# Altium PCB DSD_Badge.PcbDoc
Units mil, origin at the board's own origin, x right, y up, seen from the top; angles counter-clockwise.
Board outline 3149.61 x 3149.61 mil, 2 copper layers (Top Layer, Bottom Layer); 38 components, 38 nets, 192 pads, 0 vias.
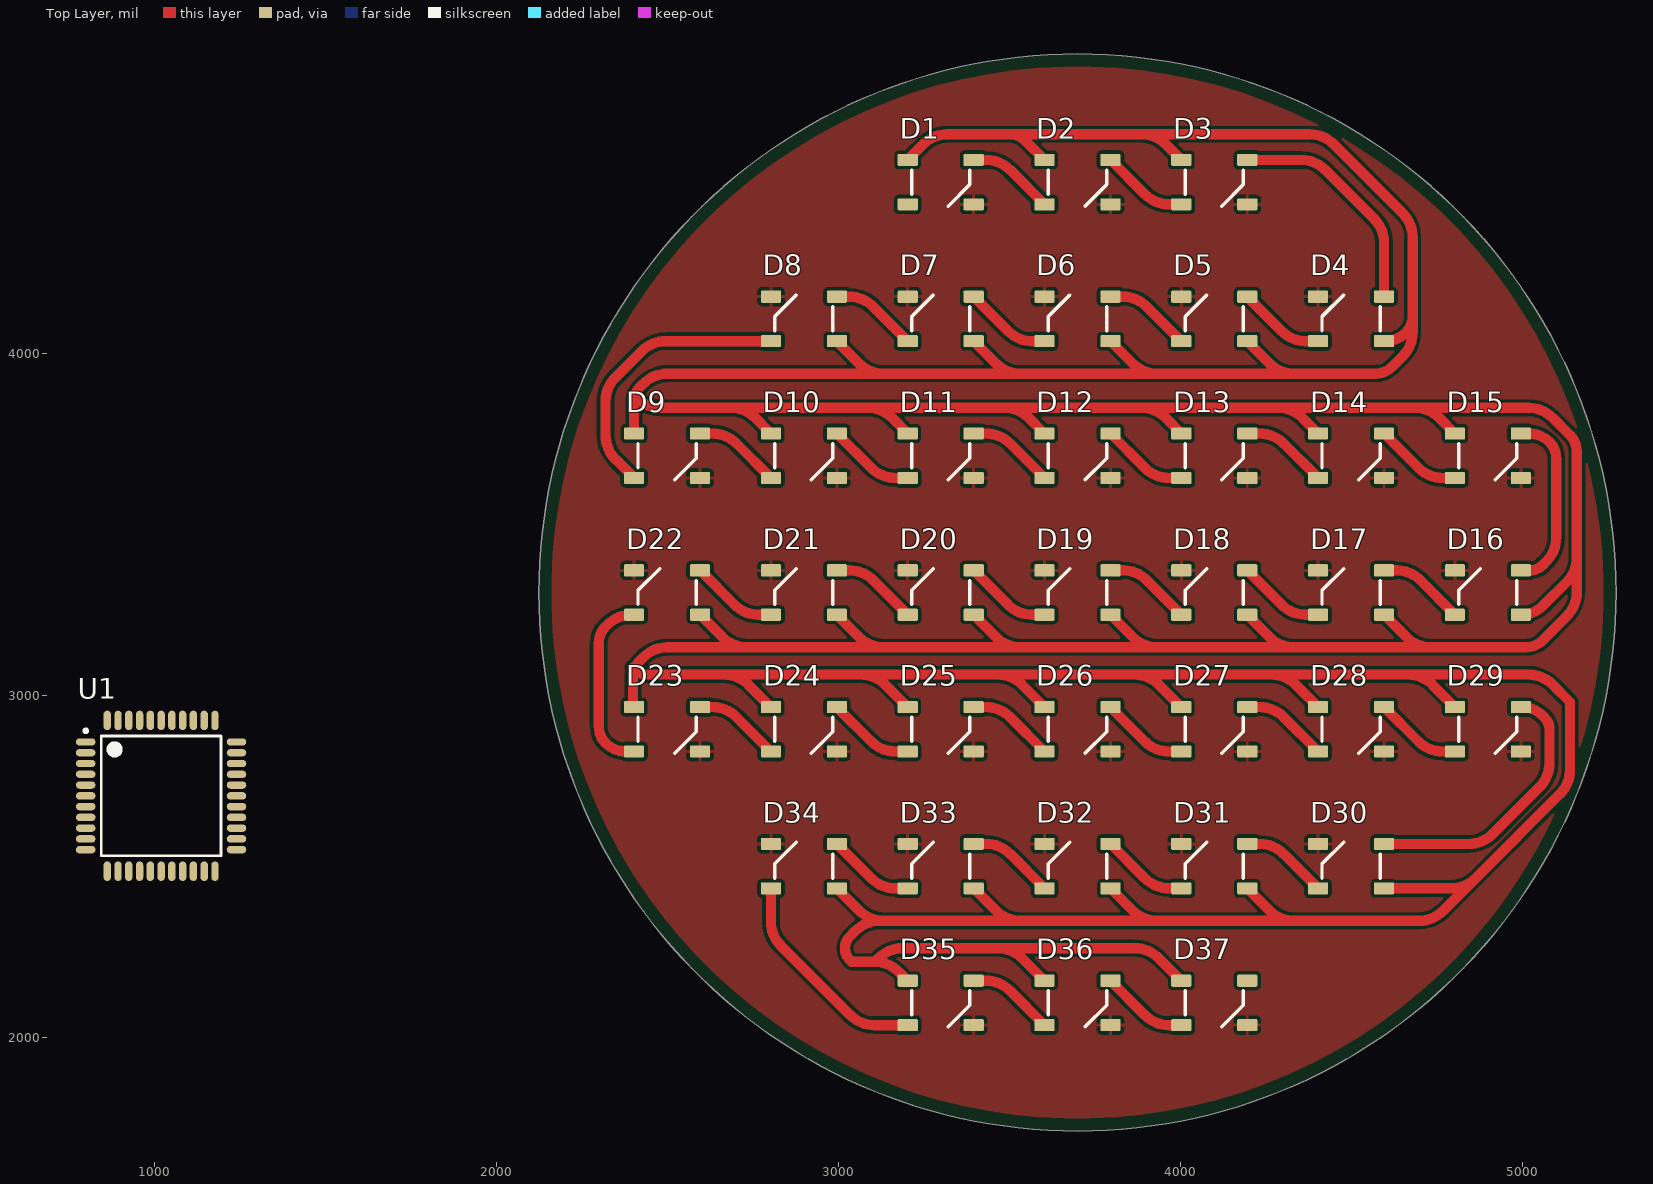
[diagram p0: Top Layer view]
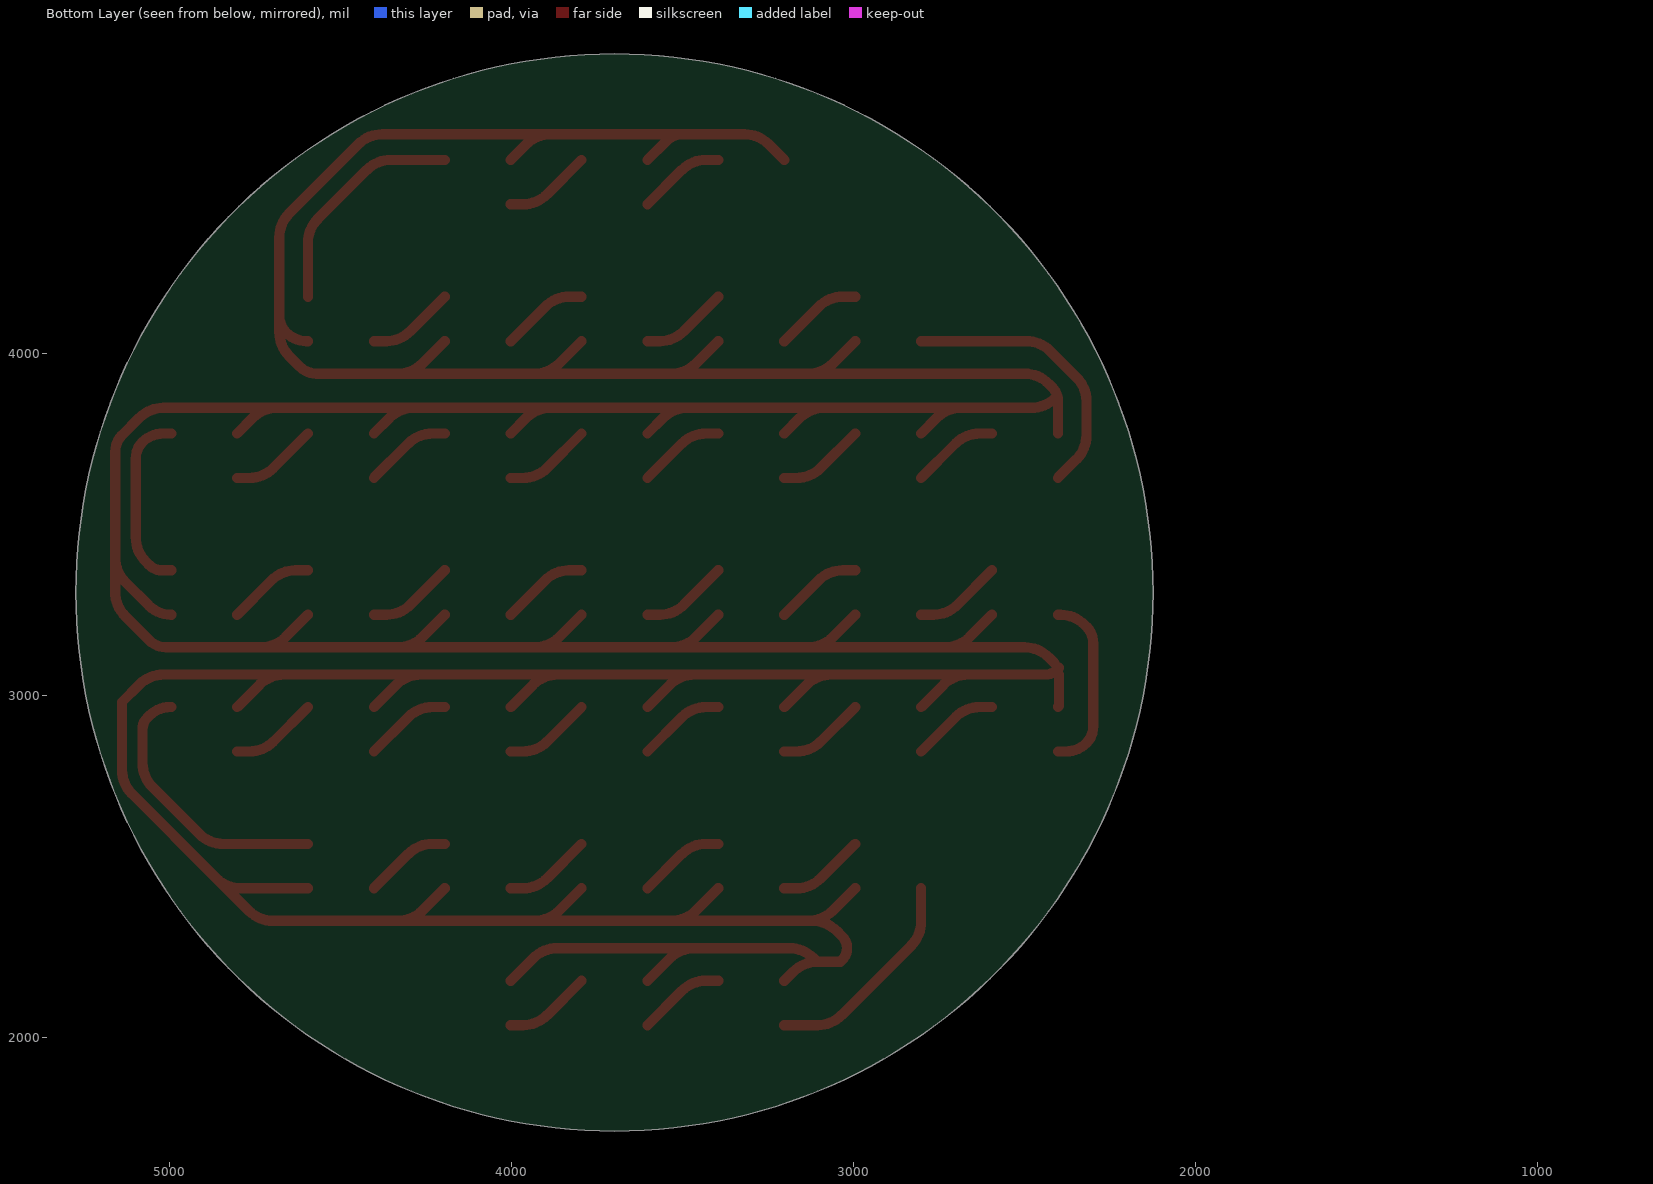
[diagram p1: Bottom Layer view, seen from below]
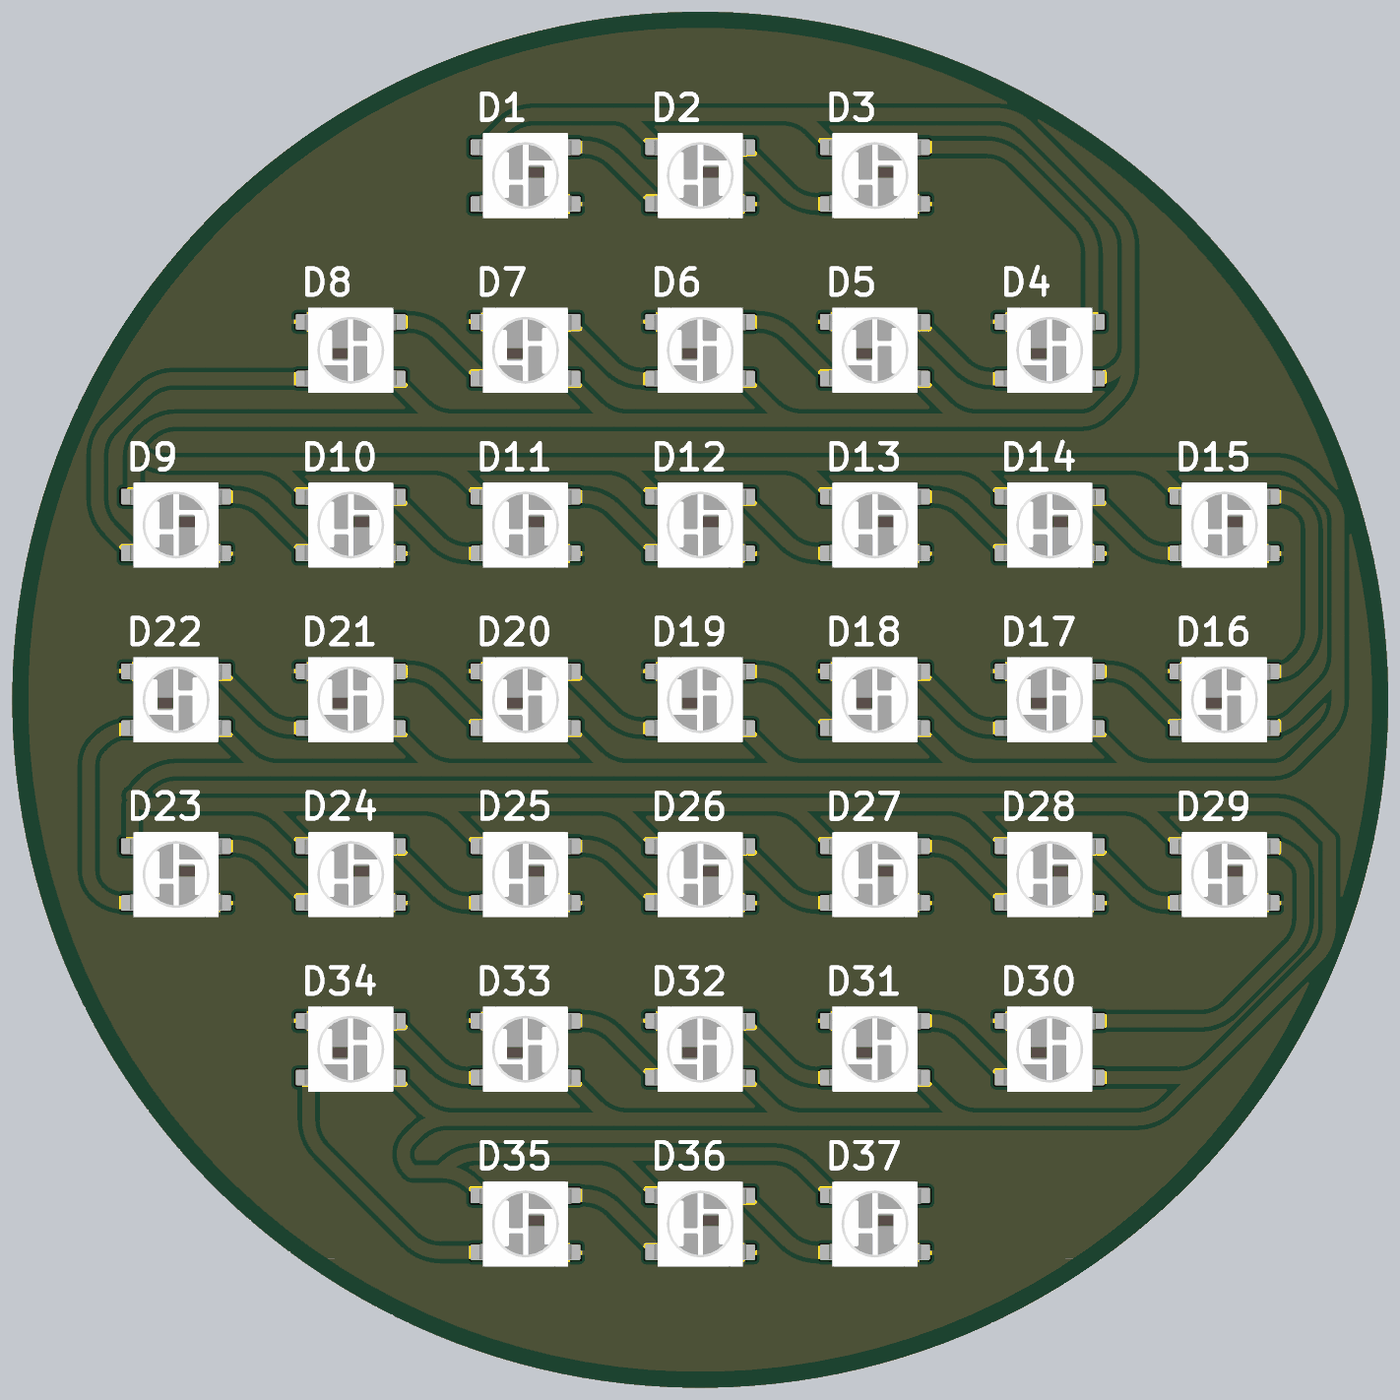
[diagram p2: 3D render of the assembled board from above, using the file's embedded part models]

## Layer stack, top to bottom
Top Solder: solder mask 0.4, Solder Resist, Dk 3.5
Top Layer: signal copper 1.4
Dielectric 1: dielectric 12.6, FR-4, Dk 4.8
Bottom Layer: signal copper 1.4
Bottom Solder: solder mask 0.4, Solder Resist, Dk 3.5

## Board outline
2125.2,3300 ccw(c3700,3300) 3700,1725.2 ccw(c3700,3300) 5274.8,3300 ccw(c3700,3300) 3700,4874.8 ccw(c3700,3300)

## Design rules (kind name [scope] priority, off if disabled: settings)
Clearance [All] p1: gap=10 ignorepadtopadclearanceinfootprint=FALSE except(0: Arc-Hole Track-Hole SMDPad-Hole THPad-Hole Via-Hole Fill-Hole Poly-Hole Region-Hole Text-Hole)
PolygonConnect [All] p1: connectstyle=Relief reliefconductorwidth=10 reliefentries=4 polygonreliefangle="90 Angle" airgapwidth=10
RoutingVias [All] p1: holewidth=28 width=50 viastyle="Through Hole" minholewidth=28 minwidth=50 maxholewidth=28 maxwidth=50
SolderMaskExpansion [All] p1: expansion=4
Width [All] p1: maxlimit=30 minlimit=10 preferedwidth=15
30 further rules are at their usual default settings.

## Components (designator, comment, footprint, x,y, rotation, side; value= is the part's Value field where it differs from the comment)
D1 "WS2812b" WS2812B 3300,4500 r0 top
D2 "WS2812b" WS2812B 3700,4500 r0 top
D3 "WS2812b" WS2812B 4100,4500 r0 top
D4 "WS2812b" WS2812B 4500,4100 r180 top
D5 "WS2812b" WS2812B 4100,4100 r180 top
D6 "WS2812b" WS2812B 3700,4100 r180 top
D7 "WS2812b" WS2812B 3300,4100 r180 top
D8 "WS2812b" WS2812B 2900,4100 r180 top
D9 "WS2812b" WS2812B 2500,3700 r0 top
D10 "WS2812b" WS2812B 2900,3700 r0 top
D11 "WS2812b" WS2812B 3300,3700 r0 top
D12 "WS2812b" WS2812B 3700,3700 r0 top
D13 "WS2812b" WS2812B 4100,3700 r0 top
D14 "WS2812b" WS2812B 4500,3700 r0 top
D15 "WS2812b" WS2812B 4900,3700 r0 top
D16 "WS2812b" WS2812B 4900,3300 r180 top
D17 "WS2812b" WS2812B 4500,3300 r180 top
D18 "WS2812b" WS2812B 4100,3300 r180 top
D19 "WS2812b" WS2812B 3700,3300 r180 top
D20 "WS2812b" WS2812B 3300,3300 r180 top
D21 "WS2812b" WS2812B 2900,3300 r180 top
D22 "WS2812b" WS2812B 2500,3300 r180 top
D23 "WS2812b" WS2812B 2500,2900 r0 top
D24 "WS2812b" WS2812B 2900,2900 r0 top
D25 "WS2812b" WS2812B 3300,2900 r0 top
D26 "WS2812b" WS2812B 3700,2900 r0 top
D27 "WS2812b" WS2812B 4100,2900 r0 top
D28 "WS2812b" WS2812B 4500,2900 r0 top
D29 "WS2812b" WS2812B 4900,2900 r0 top
D30 "WS2812b" WS2812B 4500,2500 r180 top
D31 "WS2812b" WS2812B 4100,2500 r180 top
D32 "WS2812b" WS2812B 3700,2500 r180 top
D33 "WS2812b" WS2812B 3300,2500 r180 top
D34 "WS2812b" WS2812B 2900,2500 r180 top
D35 "WS2812b" WS2812B 3300,2100 r0 top
D36 "WS2812b" WS2812B 3700,2100 r0 top
D37 "WS2812b" WS2812B 4100,2100 r0 top
U1 "ATXMEGA32A4U-AU" 44A_L 1020.47,2705.51 r0 top

## Footprints (in the part's own frame and the unit in brackets; to place one, negate y for a bottom-side part, rotate by r counter-clockwise, add the part's x,y. Pads: shape width x height; smd on the part's side, far side on the other; paste and mask are expansions set on the pad)
44A_L [mm] "Thin QFP, 44-Leads, Body 10x10mm, Pitch 0.8mm, IPC High Density"
  oval 1.45x0.55 smd: 1(-5.6,4) 2(-5.6,3.2) 3(-5.6,2.4) 4(-5.6,1.6) 5(-5.6,0.8) 6(-5.6,0) 7(-5.6,-0.8) 8(-5.6,-1.6) 9(-5.6,-2.4) 10(-5.6,-3.2) 11(-5.6,-4) 23(5.6,-4) 24(5.6,-3.2) 25(5.6,-2.4) 26(5.6,-1.6) 27(5.6,-0.8) 28(5.6,0) 29(5.6,0.8) 30(5.6,1.6) 31(5.6,2.4) 32(5.6,3.2) 33(5.6,4)
  oval 0.55x1.45 smd: 12(-4,-5.6) 13(-3.2,-5.6) 14(-2.4,-5.6) 15(-1.6,-5.6) 16(-0.8,-5.6) 17(0,-5.6) 18(0.8,-5.6) 19(1.6,-5.6) 20(2.4,-5.6) 21(3.2,-5.6) 22(4,-5.6) 34(4,5.6) 35(3.2,5.6) 36(2.4,5.6) 37(1.6,5.6) 38(0.8,5.6) 39(0,5.6) 40(-0.8,5.6) 41(-1.6,5.6) 42(-2.4,5.6) 43(-3.2,5.6) 44(-4,5.6)
  silkscreen extent -5.72,-4.45 4.45,4.95, body extent -5,-5 5,5, height 1.2
WS2812B [mm]
  rrect20% 1.5x0.9 smd: 1(-2.45,1.65) 2(-2.45,-1.65) 3(2.45,-1.65) 4(2.45,1.65)
  silkscreen extent -2.16,-1.78 2.16,0.89, body extent -2.67,-2.47 2.68,2.47, height 1.5

## Part data
D1 D2 D3 D4 D5 D6 D7 D8 D9 D10 D11 D12 D13 D14 D15 D16 D17 D18 D19 D20 D21 D22 D23 D24 D25 D26 D27 D28 D29 D30 D31 D32 D33 D34 D35 D36 D37: "ADDRESS LED DISCR SER RGB 1=10", Color=Blue,Green,Red, Manufacturer="Adafruit Industries", Manufacturer Part Number=1655, Supplier Part Number 1=1528-1104-ND, ComponentLink1Description=https://cdn-shop.adafruit.com/product-files/1138/SK6812+LED+datasheet+.pdf?src-supplier=Digi-Key, ComponentLink1URL=https://cdn-shop.adafruit.com/product-files/1138/SK6812+LED+datasheet+.pdf?src-supplier=Digi-Key, ComponentLink2Description=http://www.mouser.com/ds/2/737/SK6812_LED_datasheet_-953546.pdf?src-supplier=Mouser, ComponentLink2URL=http://www.mouser.com/ds/2/737/SK6812_LED_datasheet_-953546.pdf?src-supplier=Mouser, Length=5mm, Mount="Surface Mount", Number of LEDs=10, Pricing 1="1=4.5 (USD)", Stock 1=3911, Supplier 1=Digi-Key, Width=5mm
U1: "IC MCU 8BIT 32KB FLASH 44TQFP", Manufacturer=Atmel, Operating Temperature="-40°C ~ 85°C", Package / Case=44-TQFP, Supplier Part Number 1=ATXMEGA32A4U-AU-ND, Voltage - Supply (Vcc/Vdd)="1.6 V ~ 3.6 V", Category="Integrated Circuits (ICs)", ComponentLink1Description=http://www.atmel.com/Images/Atmel-8387-8-and16-bit-AVR-Microcontroller-XMEGA-A4U_Datasheet.pdf, ComponentLink1URL=http://www.atmel.com/Images/Atmel-8387-8-and16-bit-AVR-Microcontroller-XMEGA-A4U_Datasheet.pdf, Connectivity="I²C, IrDA, SPI, UART/USART, USB", Core Processor=AVR, Core Size=8/16-Bit, Data Converters="A/D 12x12b, D/A 2x12b", EEPROM Size="2K x 8", Manufacturer Part Number=ATXMEGA32A4U-AU, Number of I /O=34, Oscillator Type=Internal, Packaging=Tray, Peripherals="Brown-out Detect/Reset, DMA, POR, PWM, WDT", Pricing 1="1=3.43, 25=2.1548, 100=1.9152 (USD)", Program Memory Size="32KB (16K x 16)", Program Memory Type=FLASH, RAM Size="4K x 8", RoHS="RoHS Compliant", Speed=32MHz, Stock 1=2077, Supplier 1=Digi-Key

## Nets (pads, with @x,y where several pads share a name; then routed paths per layer and width w, separated by ;. In a path a pad name is that pad's centre, name@x,y a point inside that pad or via, vN(x,y) a via of type N, cw(c..) or ccw(c..) an arc to the next point about the centre after c; other vN are vias at no path point)
GND: D1.3 D2.3 D3.3 D4.3 D5.3 D6.3 D7.3 D8.3 D9.3 D10.3 D11.3 D12.3 D13.3 D14.3 D15.3 D16.3 D17.3 D18.3 D19.3 D20.3 D21.3 D22.3 D23.3 D24.3 D25.3 D26.3 D27.3 D28.3 D29.3 D30.3 D31.3 D32.3 D33.3 D34.3 D35.3 D36.3 D37.3
NetD1_4: D1.4 D2.2 | length 256.6
  Top Layer w30: D1.4 3432.2,4564.96 cw(c3432.2,4464.96) 3502.91,4535.67 D2.2
NetD2_4: D2.4 D3.2 | length 256.6
  Top Layer w30: D2.4 3897.09,4464.33 ccw(c3967.8,4535.04) 3967.8,4435.04 D3.2
NetD3_4: D3.4 D4.2 | length 673.4
  Top Layer w30: D3.4 4353.62,4564.96 cw(c4353.62,4464.96) 4424.33,4535.67 4567.17,4392.83 cw(c4496.46,4322.12) 4596.46,4322.12 D4.2
NetD4_4: D4.4 D5.2 | length 256.6
  Top Layer w30: D5.2 4297.09,4064.33 ccw(c4367.8,4135.04) 4367.8,4035.04 D4.4
NetD5_4: D5.4 D6.2 | length 256.6
  Top Layer w30: D6.2 3832.2,4164.96 cw(c3832.2,4064.96) 3902.91,4135.67 D5.4
NetD6_4: D6.4 D7.2 | length 256.6
  Top Layer w30: D7.2 3497.09,4064.33 ccw(c3567.8,4135.04) 3567.8,4035.04 D6.4
NetD7_4: D7.4 D8.2 | length 256.6
  Top Layer w30: D8.2 3032.2,4164.96 cw(c3032.2,4064.96) 3102.91,4135.67 D7.4
NetD8_4: D8.4 D9.2 | length 826.3
  Top Layer w30: D9.2 2349.29,3689.29 cw(c2420,3760) 2320,3760 2320,3860 cw(c2416.57,3860) 2348.28,3928.28 2425.75,4005.75 cw(c2496.46,3935.04) 2496.46,4035.04 D8.4
NetD9_4: D9.4 D10.2 | length 256.6
  Top Layer w30: D9.4 2632.2,3764.96 cw(c2632.2,3664.96) 2702.91,3735.67 D10.2
NetD10_4: D10.4 D11.2 | length 256.6
  Top Layer w30: D10.4 3097.09,3664.33 ccw(c3167.8,3735.04) 3167.8,3635.04 D11.2
NetD11_4: D11.4 D12.2 | length 256.6
  Top Layer w30: D11.4 3432.2,3764.96 cw(c3432.2,3664.96) 3502.91,3735.67 D12.2
NetD12_4: D12.4 D13.2 | length 256.6
  Top Layer w30: D12.4 3897.09,3664.33 ccw(c3967.8,3735.04) 3967.8,3635.04 D13.2
NetD13_4: D13.4 D14.2 | length 256.6
  Top Layer w30: D13.4 4232.2,3764.96 cw(c4232.2,3664.96) 4302.91,3735.67 D14.2
NetD14_4: D14.4 D15.2 | length 256.6
  Top Layer w30: D14.4 4697.09,3664.33 ccw(c4767.8,3735.04) 4767.8,3635.04 D15.2
NetD15_4: D15.4 D16.2 | length 535.4
  Top Layer w30: D16.2 5023.69,3364.96 ccw(c5023.69,3416.31) 5060,3380 5070.71,3390.71 ccw(c5000,3461.42) 5100,3461.42 5100,3691.72 ccw(c5031.72,3691.72) 5080,3740 ccw(c5019.74,3679.74) 5019.74,3764.96 D15.4
NetD16_4: D16.4 D17.2 | length 256.6
  Top Layer w30: D17.2 4632.2,3364.96 cw(c4632.2,3264.96) 4702.91,3335.67 D16.4
NetD17_4: D17.4 D18.2 | length 256.6
  Top Layer w30: D18.2 4297.09,3264.33 ccw(c4367.8,3335.04) 4367.8,3235.04 D17.4
NetD18_4: D18.4 D19.2 | length 256.6
  Top Layer w30: D19.2 3832.2,3364.96 cw(c3832.2,3264.96) 3902.91,3335.67 D18.4
NetD19_4: D19.4 D20.2 | length 256.6
  Top Layer w30: D20.2 3497.09,3264.33 ccw(c3567.8,3335.04) 3567.8,3235.04 D19.4
NetD20_4: D20.4 D21.2 | length 256.6
  Top Layer w30: D21.2 3032.2,3364.96 cw(c3032.2,3264.96) 3102.91,3335.67 D20.4
NetD21_4: D21.4 D22.2 | length 256.6
  Top Layer w30: D22.2 2697.09,3264.33 ccw(c2767.8,3335.04) 2767.8,3235.04 D21.4
NetD22_4: D22.4 D23.2 | length 534.7
  Top Layer w30: D23.2 2380.26,2835.04 cw(c2380.26,2920.26) 2320,2860 cw(c2368.28,2908.28) 2300,2908.28 2300,3151.72 cw(c2368.28,3151.72) 2320,3200 2325.75,3205.75 cw(c2396.46,3135.04) 2396.46,3235.04 D22.4
NetD23_4: D23.4 D24.2 | length 256.6
  Top Layer w30: D23.4 2632.2,2964.96 cw(c2632.2,2864.96) 2702.91,2935.67 D24.2
NetD24_4: D24.4 D25.2 | length 256.6
  Top Layer w30: D24.4 3097.09,2864.33 ccw(c3167.8,2935.04) 3167.8,2835.04 D25.2
NetD25_4: D25.4 D26.2 | length 256.6
  Top Layer w30: D25.4 3432.2,2964.96 cw(c3432.2,2864.96) 3502.91,2935.67 D26.2
NetD26_4: D26.4 D27.2 | length 256.6
  Top Layer w30: D26.4 3897.09,2864.33 ccw(c3967.8,2935.04) 3967.8,2835.04 D27.2
NetD27_4: D27.4 D28.2 | length 256.6
  Top Layer w30: D27.4 4232.2,2964.96 cw(c4232.2,2864.96) 4302.91,2935.67 D28.2
NetD28_4: D28.4 D29.2 | length 256.6
  Top Layer w30: D28.4 4697.09,2864.33 ccw(c4767.8,2935.04) 4767.8,2835.04 D29.2
NetD29_4: D29.4 D30.2 | length 812.1
  Top Layer w30: D30.2 4843.54,2564.96 ccw(c4843.54,2664.96) 4914.25,2594.25 5050.71,2730.71 ccw(c4980,2801.42) 5080,2801.42 5080,2900 ccw(c5031.72,2900) 5065.86,2934.14 5060,2940 ccw(c4999.74,2879.74) 4999.74,2964.96 D29.4
NetD30_4: D30.4 D31.2 | length 256.6
  Top Layer w30: D31.2 4232.2,2564.96 cw(c4232.2,2464.96) 4302.91,2535.67 D30.4
NetD31_4: D31.4 D32.2 | length 256.6
  Top Layer w30: D32.2 3897.09,2464.33 ccw(c3967.8,2535.04) 3967.8,2435.04 D31.4
NetD32_4: D32.4 D33.2 | length 256.6
  Top Layer w30: D33.2 3432.2,2564.96 cw(c3432.2,2464.96) 3502.91,2535.67 D32.4
NetD33_4: D33.4 D34.2 | length 256.6
  Top Layer w30: D34.2 3097.09,2464.33 ccw(c3167.8,2535.04) 3167.8,2435.04 D33.4
NetD34_4: D34.4 D35.2 | length 638.3
  Top Layer w30: D34.4 2803.54,2337.88 ccw(c2903.54,2337.88) 2832.83,2267.17 3035.67,2064.33 ccw(c3106.38,2135.04) 3106.38,2035.04 D35.2
NetD35_4: D35.4 D36.2 | length 256.6
  Top Layer w30: D35.4 3432.2,2164.96 cw(c3432.2,2064.96) 3502.91,2135.67 D36.2
NetD36_4: D36.4 D37.2 | length 256.6
  Top Layer w30: D36.4 3897.09,2064.33 ccw(c3967.8,2135.04) 3967.8,2035.04 D37.2
VLED: D1.1 D2.1 D3.1 D4.1 D5.1 D6.1 D7.1 D8.1 D9.1 D10.1 D11.1 D12.1 D13.1 D14.1 D15.1 D16.1 D17.1 D18.1 D19.1 D20.1 D21.1 D22.1 D23.1 D24.1 D25.1 D26.1 D27.1 D28.1 D29.1 D30.1 D31.1 D32.1 D33.1 D34.1 D35.1 D36.1 D37.1 | length 22464.7
  Top Layer w30: 2400,3060 2400,2973.51 ccw(c2412.1,2973.51) D23.1 ; 2400,3080 2405.86,3074.14 ccw(c2440,3108.28) 2440,3060 2667.08,3060 ; D9.1 2403.54,3860.27 cw(c2459.73,3860.27) 2405.4,3874.6 ; 2414.14,3094.14 2430.71,3110.71 cw(c2501.42,3040) 2501.42,3140 2732.92,3140 ; D22.1 2662.21,3169.29 ccw(c2732.92,3240) 2732.92,3140 ; D24.1 2737.79,3030.71 ccw(c2667.08,2960) 2667.08,3060 ; D10.1 2757.79,3810.71 ccw(c2687.08,3740) 2687.08,3840 ; D34.1 3062.21,2369.29 ccw(c3132.92,2440) 3132.92,2340 ; D21.1 3062.21,3169.29 ccw(c3132.92,3240) 3132.92,3140 ; D8.1 3062.21,3969.29 ccw(c3132.92,4040) 3132.92,3940 ; D35.1 3177.79,2190.71 ccw(c3107.08,2120) 3107.08,2220 ; D25.1 3137.79,3030.71 ccw(c3067.08,2960) 3067.08,3060 ; D11.1 3157.79,3810.71 ccw(c3087.08,3740) 3087.08,3840 ; D1.1 3249.29,4610.71 cw(c3320,4540) 3320,4640 3500,4640 ; D33.1 3462.21,2369.29 ccw(c3532.92,2440) 3532.92,2340 ; D20.1 3462.21,3169.29 ccw(c3532.92,3240) 3532.92,3140 ; D7.1 3462.21,3969.29 ccw(c3532.92,4040) 3532.92,3940 ; D36.1 3537.79,2230.71 ccw(c3467.08,2160) 3467.08,2260 ; D26.1 3537.79,3030.71 ccw(c3467.08,2960) 3467.08,3060 ; D12.1 3557.79,3810.71 ccw(c3487.08,3740) 3487.08,3840 ; D2.1 3548.66,4619.84 ccw(c3500,4571.19) 3500,4640 ; D32.1 3862.21,2369.29 ccw(c3932.92,2440) 3932.92,2340 ; D19.1 3862.21,3169.29 ccw(c3932.92,3240) 3932.92,3140 ; D6.1 3862.21,3969.29 ccw(c3932.92,4040) 3932.92,3940 ; D37.1 3937.79,2230.71 ccw(c3867.08,2160) 3867.08,2260 3467.08,2260 ; D27.1 3937.79,3030.71 ccw(c3867.08,2960) 3867.08,3060 ; D13.1 3957.79,3810.71 ccw(c3887.08,3740) 3887.08,3840 ; D3.1 3957.79,4610.71 ccw(c3887.08,4540) 3887.08,4640 ; D31.1 4262.21,2369.29 ccw(c4332.92,2440) 4332.92,2340 ; D18.1 4262.21,3169.29 ccw(c4332.92,3240) 4332.92,3140 ; D5.1 4262.21,3969.29 ccw(c4332.92,4040) 4332.92,3940 ; D28.1 4337.79,3030.71 ccw(c4267.08,2960) 4267.08,3060 ; D14.1 4357.79,3810.71 ccw(c4287.08,3740) 4287.08,3840 ; D30.1 4793.62,2435.04 ccw(c4793.62,2535.04) 4864.33,2464.33 ; D17.1 4662.21,3169.29 ccw(c4732.92,3240) 4732.92,3140 ; D4.1 4599.74,4035.04 ccw(c4599.74,4120.26) 4660,4060 ccw(c4611.72,4108.28) 4680,4108.28 ; D29.1 4737.79,3030.71 ccw(c4667.08,2960) 4667.08,3060 ; D15.1 4757.79,3810.71 ccw(c4687.08,3740) 4687.08,3840 ; D16.1 ccw(c4996.46,3328.19) 5062.32,3262.32 5130.71,3330.71 ccw(c5060,3401.42) 5160,3401.42 ; 2405.4,3874.6 cw(c2459.73,3860.27) 2420,3900 2430.71,3910.71 cw(c2501.42,3840) 2480.48,3937.78 cw(c2501.42,3840) 2501.42,3940 3132.92,3940 ; 2405.4,3874.6 2410.71,3869.29 ccw(c2481.42,3940) 2481.42,3840 2687.08,3840 ; 2667.08,3060 3067.08,3060 ; 2687.08,3840 3087.08,3840 ; 2732.92,3140 3132.92,3140 ; 3067.08,3060 3467.08,3060 ; 3087.08,3840 3487.08,3840 ; 3107.08,2220 3040,2220 3034.14,2225.86 cw(c3068.28,2260) 3020,2260 cw(c3068.28,2260) 3034.14,2294.14 3050.71,2310.71 cw(c3121.42,2240) 3121.42,2340 3132.92,2340 ; 3107.08,2220 3117.79,2230.71 cw(c3188.5,2160) 3188.5,2260 3467.08,2260 ; 3132.92,2340 3532.92,2340 ; 3132.92,3140 3532.92,3140 ; 3132.92,3940 3532.92,3940 ; 3467.08,3060 3867.08,3060 ; 3487.08,3840 3887.08,3840 ; 3500,4640 3887.08,4640 ; 3532.92,2340 3932.92,2340 ; 3532.92,3140 3932.92,3140 ; 3532.92,3940 3932.92,3940 ; 3867.08,3060 4267.08,3060 ; 3887.08,3840 4287.08,3840 ; 3887.08,4640 4378.58,4640 cw(c4378.58,4540) 4449.29,4610.71 4650.71,4409.29 cw(c4580,4338.58) 4680,4338.58 4680,4108.28 ; 3932.92,2340 4332.92,2340 ; 3932.92,3140 4332.92,3140 ; 3932.92,3940 4332.92,3940 ; 4267.08,3060 4667.08,3060 ; 4287.08,3840 4687.08,3840 ; 4332.92,2340 4698.58,2340 ccw(c4698.58,2440) 4769.29,2369.29 4864.33,2464.33 ; 4332.92,3140 4732.92,3140 ; 4332.92,3940 4571.72,3940 ccw(c4571.72,4008.28) 4620,3960 4650.71,3990.71 ccw(c4580,4061.42) 4680,4061.42 4680,4108.28 ; 4667.08,3060 5018.58,3060 cw(c5018.58,2960) 5089.29,3030.71 5140,2980 5140,2781.42 cw(c5040,2781.42) 5110.71,2710.71 4864.33,2464.33 ; 4687.08,3840 5018.58,3840 cw(c5018.58,3740) 5089.29,3810.71 5140,3760 cw(c5091.72,3711.72) 5160,3711.72 5160,3401.42 ; 4732.92,3140 5011.72,3140 ccw(c5011.72,3208.28) 5060,3160 5130.71,3230.71 ccw(c5060,3301.42) 5160,3301.42 5160,3401.42
pads on no net: D1.2 D37.4 U1.1 U1.2 U1.3 U1.4 U1.5 U1.6 U1.7 U1.8 U1.9 U1.10 U1.11 U1.12 U1.13 U1.14 U1.15 U1.16 U1.17 U1.18 U1.19 U1.20 U1.21 U1.22 U1.23 U1.24 U1.25 U1.26 U1.27 U1.28 U1.29 U1.30 U1.31 U1.32 U1.33 U1.34 U1.35 U1.36 U1.37 U1.38 U1.39 U1.40 U1.41 U1.42 U1.43 U1.44

## Polygon pours and split planes (outlines as drawn)
GND on Top Layer "GND_L01_P001" (solid, pour order 1): 2162.08,3300 ccw(c3700,3300) 3700,1762.08 ccw(c3700,3300) 5237.92,3300 ccw(c3700,3300) 3700,4837.92 ccw(c3700,3300)

## Silkscreen, mask and mechanical layers (free items; w line width, h text height)
Mechanical 1:
  circle w10: c3700,3300 r1574.8